# Altium PCB pcb.PcbDoc
Units mm, origin at the board's own origin, x right, y up, seen from the top; angles counter-clockwise.
Board outline 60 x 45 mm, 2 copper layers (Top Layer, Bottom Layer); 36 components, 23 nets, 95 pads, 17 vias.
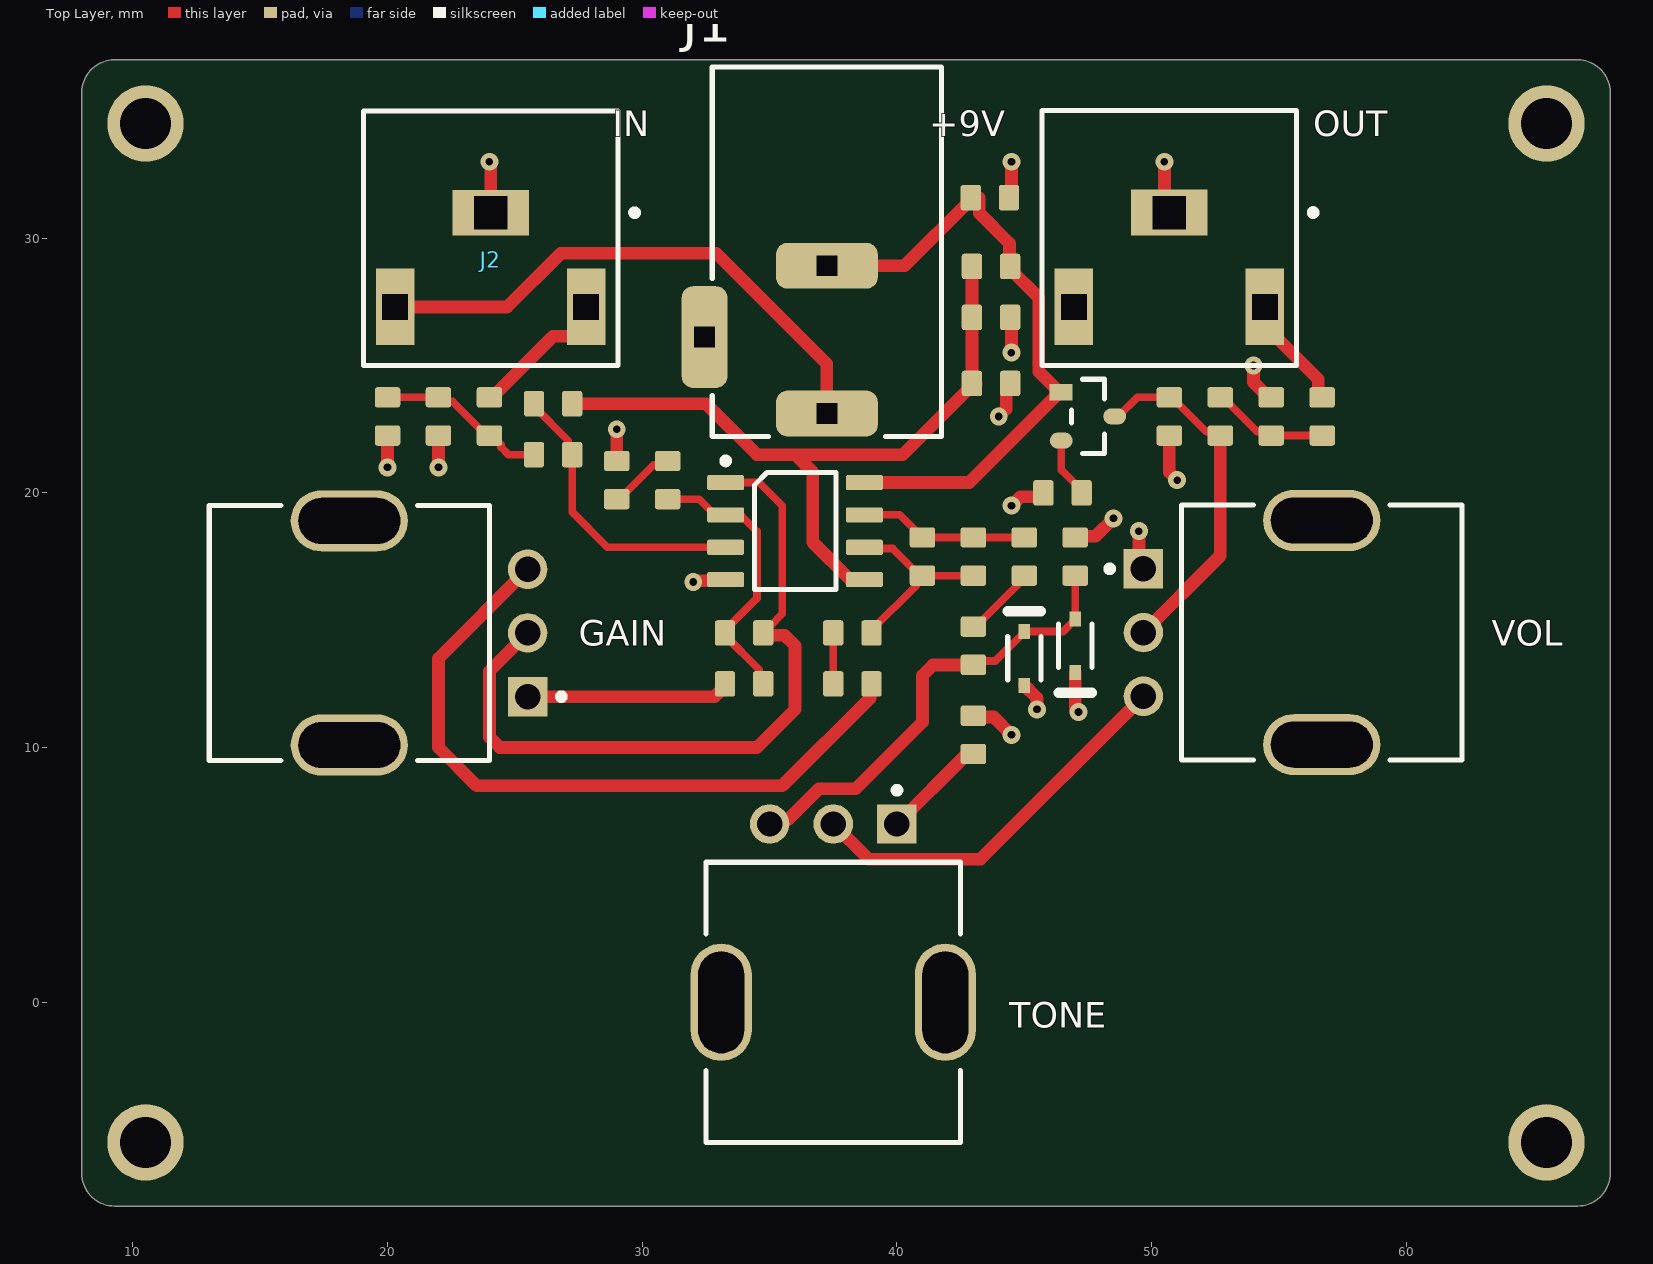
[diagram p0: Top Layer view]
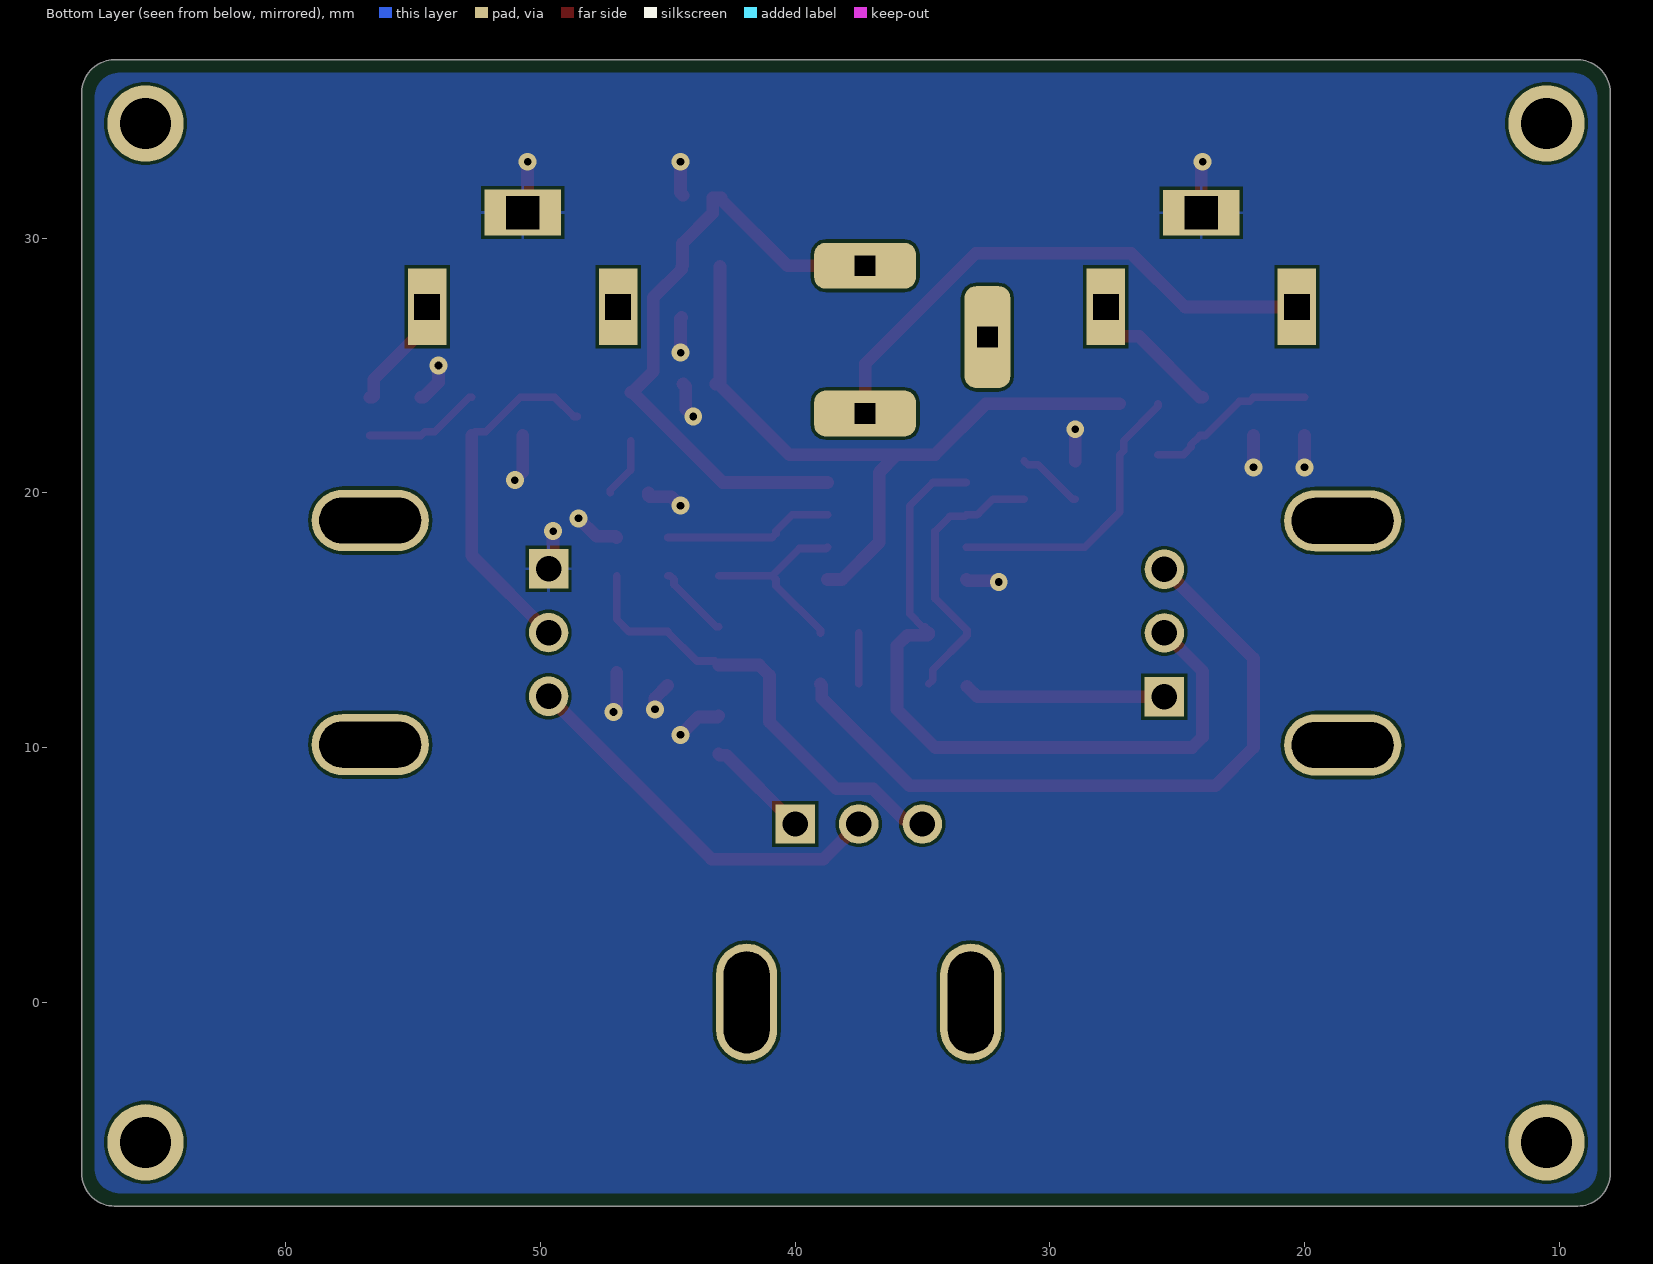
[diagram p1: Bottom Layer view, seen from below]
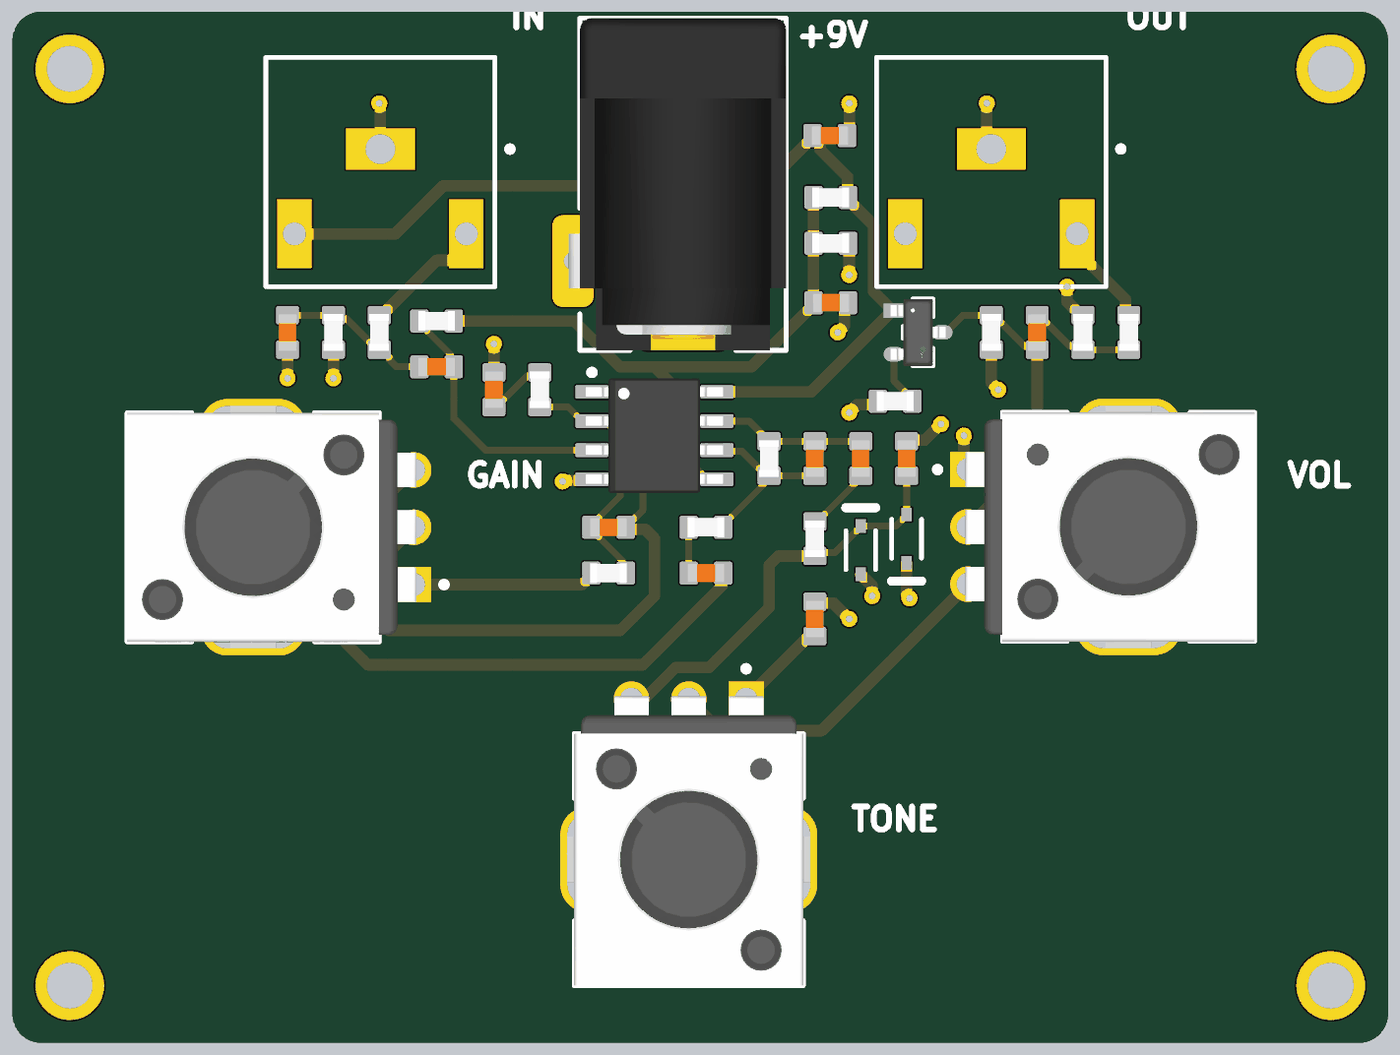
[diagram p2: 3D render of the assembled board from above, using the file's embedded part models]

## Layer stack, top to bottom
Top Solder: solder mask 0.0102, Solder Resist, Dk 3.5
Top Layer: signal copper 0.0356
Dielectric 1: dielectric 0.32, FR-4, Dk 4.8
Bottom Layer: signal copper 0.0356
Bottom Solder: solder mask 0.0102, Solder Resist, Dk 3.5

## Board outline
9.27,-8 cw(c9.27,-6.73) 8,-6.73 8,35.73 cw(c9.27,35.73) 9.27,37 66.73,37 cw(c66.73,35.73) 68,35.73 68,-6.73 cw(c66.73,-6.73) 66.73,-8

## Design rules (kind name [scope] priority, off if disabled: settings)
BoardOutlineClearance [All] p1: gap=0.2 ignorepadtopadclearanceinfootprint=FALSE
Clearance [All] p1: gap=0.127 ignorepadtopadclearanceinfootprint=FALSE except(0.25: Arc-Hole Track-Hole SMDPad-Hole THPad-Hole Via-Hole Fill-Hole Poly-Hole Region-Hole Text-Hole)
ComponentClearance [All] p1: gap=0.127 collisioncheckmode=3 verticalgap=0.127 showdistances=TRUE
DiffPairsRouting [All] p1: maxlimit=0.254 minlimit=0.127 mostfreqgap=0.127 toplayer_minwidth=0.127 toplayer_maxwidth=25.4 toplayer_prefwidth=0.127 bottomlayer_minwidth=0.127 bottomlayer_maxwidth=25.4 bottomlayer_prefwidth=0.127 maxuncoupledlength=12.7
Height [All] p1: minheight=0 maxheight=1816.048 prefheight=12.7
HoleSize [All] p1: absolutevalues=TRUE maxlimit=6.3 minlimit=0.3 maxpercent=80.000 minpercent=20.000
HoleToHoleClearance [All] p1: gap=0.25 allowstackedmicrovias=FALSE
MinimumAnnularRing [All] p1: minimumring=0.076
MinimumSolderMaskSliver [All] p1: minsoldermaskwidth=0
PlaneClearance [All] p1: clearance=0.127
PlaneConnect PlaneConnectPowerPads [InPadClass('PowerPads')] p1: planeconnectstyle=Direct reliefexpansion=0.508 reliefentries=4 reliefconductorwidth=0.254 reliefairgap=0.254
PlaneConnect [All] p2: pad.planeconnectstyle=Relief pad.reliefexpansion=0.3 pad.reliefentries=4 pad.reliefconductorwidth=0.127 pad.reliefairgap=0.127 via.planeconnectstyle=Direct via.reliefexpansion=0.3 via.reliefentries=4 via.reliefconductorwidth=0.127 via.reliefairgap=0.127
PolygonConnect PolygonConnectPowerPads [All vs (InPadClass('PowerPads'))] p1: connectstyle=Direct reliefconductorwidth=0.254 reliefentries=4 polygonreliefangle="90 Angle" airgapwidth=0.254
PolygonConnect [All] p2: thpad.connectstyle=Relief thpad.reliefconductorwidth=0.127 thpad.reliefentries=4 thpad.polygonreliefangle="90 Angle" thpad.airgapwidth=0.127 smdpad.connectstyle=Relief smdpad.reliefconductorwidth=0.127 smdpad.reliefentries=4 smdpad.polygonreliefangle="90 Angle" smdpad.airgapwidth=0.127 via.connectstyle=Direct via.reliefconductorwidth=0.127 via.reliefentries=4 via.polygonreliefangle="90 Angle" via.airgapwidth=0.127
RoutingVias [All] p1: holewidth=0.3 width=0.6 viastyle="Through Hole" minholewidth=0.3 minwidth=0.6 maxholewidth=0.6 maxwidth=6.6
SilkToSilkClearance [All] p1: silktosilkclearance=0
SilkToSolderMaskClearance [IsPad] p1: minsilkscreentomaskgap=0.127 clearancetoexposedcopper=TRUE
SolderMaskExpansion [All] p1: expansion=0.075 istentingtop=FALSE
SupplyNets "Schematic Supply Nets_1" [InNet('GND')] p1: voltage=0.000
SupplyNets "Schematic Supply Nets" [InNet('+9V')] p2: voltage=0.000
Width [All] p1: maxlimit=25.4 minlimit=0.127 preferedwidth=0.127 minimp=50.000000 maximp=50.000000 favimp=50.000000
20 further rules are at their usual default settings.

## Classes and differential pairs
component class schematic: J J1

## Components (designator, comment, footprint, x,y, rotation, side; value= is the part's Value field where it differs from the comment)
C1 "47u" CAP_0603 43.65,31.592 r0 top
C2 "47u" CAP_0603 43.694,24.295 r0 top
C3 "680n" CAP_0603 38.25,12.5 r180 top
C4 "1u" CAP_0603 45,17.5 r90 top
C5 "50p" CAP_0603 34,14.5 r180 top
C6 "100p" CAP_0603 43,17.5 r270 top
C7 "47n" CAP_0603 29,20.5 r90 top
C8 "1u" CAP_0603 52.694,23 r270 top
C9 "22n" CAP_0603 26.5,21.5 r180 top
C10 "22n" CAP_0603 47,17.5 r270 top
C11 "22n" CAP_0603 43,10.5 r270 top
C12 "100p" CAP_0603 20,23 r90 top
D1 "1N4148" DIOD-SOD323-2-A_V 45,13.5 r90 top
D2 "1N4148" DIOD-SOD323-2-A_V 47,14 r270 top
J1 "9V DC" 694106301002 37.248,29.466 r180 top
J2 "INPUT AUX" SWIT-PJRAN1X1U01X_V 24.05,31 r180 top
J3 "OUTPUT AUX" SWIT-PJRAN1X1U01X_V 50.693,31.004 r180 top
Q1 "J201" FP-318BM-IPC_C 47.5,23 r0 top
R1 "10k" RES_0603 43.694,28.891 r0 top
R2 "10k" RES_0603 43.694,26.891 r180 top
R3 "100k B TAPER" FP-PTV09A-4-MFG 18.5,14.5 r90 top value=10kΩ
R4 "2.2k" RES_0603 34,12.5 r0 top
R5 "4.7k" RES_0603 31,20.5 r270 top
R6 "680k" RES_0603 41,17.5 r270 top
R7 "220" RES_0603 56.694,23 r90 top
R8 "100k B TAPER" FP-PTV09A-4-MFG 56.679,14.517 r270 top value=10kΩ
R9 "10k" RES_0603 24,23 r90 top
R10 "100k B TAPER" FP-PTV09A-4-MFG 37.5,0 r180 top value=10kΩ
R11 "10k" RES_0603 38.25,14.5 r180 top
R12 "1k" RES_0603 43,14 r90 top
R13 "10k" RES_0603 54.694,23 r270 top
R14 "20k" RES_0603 50.694,23 r90 top
R15 "10k" RES_0603 46.5,20 r0 top
R16 "1M" RES_0603 22,23 r90 top
R17 "1M" RES_0603 26.5,23.5 r180 top
U1 "TL072" SOIC-8 36,18.5 r0 top

## Footprints (in the part's own frame and the unit in brackets; to place one, negate y for a bottom-side part, rotate by r counter-clockwise, add the part's x,y. Pads: shape width x height; smd on the part's side, far side on the other; paste and mask are expansions set on the pad)
694106301002 [mm] "DC Power Jack Right Angled(6.4)"
  rrect50% 4x1.8 hole 0.8 square: 1(0,6.35) 2(0,0.55)
  rrect50% 1.8x4 hole 0.8 square: 3(4.8,3.35)
  silkscreen extent -4.5,-7.25 4.5,7.25, body extent -4.5,-7.25 5,7.25, height 10.75
CAP_0603 [mm]
  rrect25% 0.8x1 smd: 1(-0.75,0) 2(0.75,0)
  body extent -0.8,-0.4 0.8,0.4, height 0.51
DIOD-SOD323-2-A_V [mm] "SOD-323, 2-Leads, Body 1.7x1.3mm"
  rect 0.59x0.45 smd: 1(-1.055,0) 2(1.055,0)
  silkscreen extent -0.85,-0.65 1.85,0.65, body extent -0.85,-0.65 0.85,0.65, height 1.2
FP-318BM-IPC_C [mm]
  rect 0.904x0.631 smd paste+0 mask+0: 1(-1.05,0.95)
  rrect100% 0.904x0.631 smd paste+0 mask+0: 2(-1.05,-0.95) 3(1.05,0)
  silkscreen extent -0.65,-1.46 0.65,1.46, body extent -1.6,-1.56 1.6,1.56, height 0.25
FP-PTV09A-4-MFG [mm]
  rect 1.55x1.55 hole 1 paste-2539.97 mask+0: 1(-2.5,-7)
  round 1.55 hole 1 paste-2539.97 mask+0: 2(0,-7) 3(2.5,-7)
  rrect100% 2.4x4.6 hole 4 slot 1.8 at 0 deg paste-2539.97 mask+0: 4(-4.4,0) 5(4.4,0)
  silkscreen extent -5,-8.45 5,5.5, body extent -5.8,-7.88 5.8,5.6, height 0.25
RES_0603 [mm]
  rrect25% 0.8x1 smd: 1(-0.75,0) 2(0.75,0)
  body extent -0.8,-0.43 0.8,0.43, height 0.52
SOIC-8 [mm] "SOIC, 8-Leads, Body 4.91x3.90mm, Pitch 1.27mm, IPC Medium Density"
  rrect25% 1.45x0.6 smd: 1(-2.725,1.905) 2(-2.725,0.635) 3(-2.725,-0.635) 4(-2.725,-1.905) 5(2.725,-1.905) 6(2.725,-0.635) 7(2.725,0.635) 8(2.725,1.905)
  silkscreen extent -2.85,-2.3 1.6,2.88, body extent -3,-2.5 3,2.5, height 1.75
SWIT-PJRAN1X1U01X_V [mm] "Jack, 3-Leads, Body 19.5x10mm"
  rect 3x1.8 hole 1.3 square paste-2539.97: 1(0,0)
  rect 1.5x3 hole 1 square paste-2539.97: 2(-3.75,3.7) 3(3.75,3.7)
  silkscreen extent -5.77,-4 5,6, body extent -5,-13.5 5,6, height 13

## Part data
C1 C2 C3 C4 C5 C6 C7 C8 C9 C10 C11 C12: library part CAP_0603, "Capacitor SMD 0603"
D1 D2: library part CMP-1667-00004-1, "Fast Switching Diode, 75 V, 0.3 A, -65 to 150 degC, 2-Pin SOD323, RoHS, Tape and Reel", ComponentLink1Description="Manufacturer URL", ComponentLink1URL=http://www.diodes.com/, ComponentLink2Description=Datasheet, ComponentLink2URL=http://www.diodes.com/datasheets/ds30097.pdf, DatasheetVersion="Rev. 25-2, 03/2016", PackageDescription="2-Pin Small Outline Diode, Body 1.7 x 1.3 mm", PackageReference=SOD323-2
J1: library part CMP-1502-00188-2, Color=Black, Current Rating=5A, Flammability Rating="UL94 V-0", Insulation Resistance=100MΩ, Max Operating Temperature=85°C, Min Operating Temperature=-40°C, Operating Supply Voltage=24V, Voltage Rating (DC)=20V, Connector Type=Power, Contact Gender=Female, Contact Material="Gold, Tin", Contact Plating=Tin, Gender=Male, Height=11mm, Housing Material=Polyamide, Mount="Through Hole", NexarPartId=52676100, Number of Contacts=3, Packaging=Bulk, REACH SVHC=Unknown, RoHS=Compliant, Shielding=Unshielded, Termination="Through Hole", Voltage Rating=24V
J2 J3: library part CMP-1772-00003-1, "Female Phono Jack, 3 Position, Height 13 mm, Tail Length 4 mm, RoHS, Bulk", Capacitance="100 nF", Case\Package=Radial, Max Operating Temperature="125 degC", Min Operating Temperature="-55 degC", Package Quantity=500, Tolerance=10%, Type (Capacitors)=X7R, Voltage Rating="50 V", ComponentLink1Description="Manufacturer URL", ComponentLink1URL=http://www.switchcraft.com/, ComponentLink2Description=Datasheet, ComponentLink2URL=http://www.conxall.com/Drawings/pjran1x1u__x_series_cd.pdf, DatasheetVersion="Rev. A, 01/2006", Height="3.18 mm", Lead Pitch="2.54 mm", Length="6.6 mm", Mount="Through Hole", PackageDescription="Female Phono Jack, 3 Position, Height 13 mm, Tail Length 4 mm", PackageReference=PJRAN1X1U01X, Packaging=Bulk, Pins=2, Radiation Hardening=No, REACH SVHC="No SVHC", RoHSCompliant=true, Voltage Rating (DC)="50 V", Width="5.08 mm"
Q1: library part CMP-07172-000003-1, "JFET N-CH 40V 350MW SOT23", Breakdown Voltage=-40V, Continuous Drain Current=1mA, Manufacturer="ON Semiconductor", Manufacturer Part Number=MMBFJ201, Max Junction Temp=+150°C, Package=318BM, Power Dissipation=350mW, Temperature="-55°C to +150°C", Temperature Range Low=-55°C, Automotive=No, Category=Trans, ComponentLink2Description=Datasheet, ComponentLink2URL=https://www.onsemi.com/pub/Collateral/MMBFJ202-D.pdf, Device Class L1="Discrete Semiconductors", Device Class L2=Transistors, Device Class L3=JFETs, Digikey Description="JFET N-CH 40V 350MW SOT23", Footprint Url=https://www.onsemi.com/pub/Collateral/318BM.PDF, Gate To Source Voltage=-40V, Height=1.2mm, Ipc Land Pattern Name=SOT95P240X120-3, Lead Free=Yes, Mouser Description="JFET N-Channel Transistor General Purpose", Number Of Channels=1, Number Of N Channels=1, Octopart=https://octopart.com/mmbfj201-on+semiconductor-84330255, RoHS=TRUE, Rthja Max=357°C/W, Standoff Height=0mm, Temperature Range High=+150°C
R1 R2 R4 R5 R6 R7 R9 R11 R12 R13 R14 R15 R16 R17: library part RES_0603, "Resistor SMD 0603"
R3 R8 R10: library part CMP-07234-000013-1, "POT 10K OHM 1/20W CARBON LINEAR", Manufacturer="Bourns Inc.", Manufacturer Part Number=PTV09A-4020U-B103, Package=PTV09A-4, Power Rating=0.05W, Resistance=10kΩ, Temperature="-10°C to +50°C", Temperature Range High=+50°C, Temperature Range Low=-10°C, Tolerance=20%, Voltage Rating=50V, Automotive=No, Category=Res, ComponentLink2Description=Datasheet, ComponentLink2URL=https://www.bourns.com/docs/product-datasheets/ptv09.pdf?sfvrsn=5e1089f1_12, Composition=Carbon, Device Class L1="Passive Components", Device Class L2=Resistors, Device Class L3="Variable Resistors and Potentiometers", Digikey Description="POT 10K OHM 1/20W CARBON LINEAR", Height=20.5mm, Lead Free=Yes, Mouser Description="Potentiometers 10K LINEAR 20%", Octopart=https://octopart.com/ptv09a-4020u-b103-bourns-1878033, RoHS=TRUE, Series=PTV09
U1: library part TL072CDT, "Dual JFET Low-Noise Operational Amplifiers", Manufacturer=STMicroelectronics, Manufacturer Part Number=TL072CDT

## Free pads (board coordinates)
  round 3 hole 2: 2(10.5,-5.5) 2(10.5,34.5) 2(65.5,-5.5) 2(65.5,34.5)

## Via types
v1: diameter 0.7, hole 0.3, Top Layer to Bottom Layer, 17 vias

## Nets (pads, with @x,y where several pads share a name; then routed paths per layer and width w, separated by ;. In a path a pad name is that pad's centre, name@x,y a point inside that pad or via, vN(x,y) a via of type N, cw(c..) or ccw(c..) an arc to the next point about the centre after c; other vN are vias at no path point)
+9V: C1.1 J1.2 Q1.1 R1.2 U1.8 | length 25.2
  Top Layer w0.5: J1.2 40.298,28.916 C1.1@42.902,31.52 ; U1.8 42.838,20.405 Q1.1@46.383,23.95 ; C1.1@42.902,31.584 43.229,31.584 43.229,30.984 44.42,29.793 44.42,28.916 R1.2 44.444,28.791 45.568,27.667 45.568,24.764 Q1.1@46.383,23.95 ; Q1.1 Q1.1@46.383,23.95
GND: C1.2 C2.2 C7.2 C10.1 C11.1 C12.1 D1.1 D2.2 J2.1 J3.1 R2.1 R8.1 R13.1 R14.1 R15.1 R16.1 U1.4 | length 26.6
  Top Layer w0.5: v1(20,21) C12.1 ; v1(22,21) R16.1 ; v1(24,33) 24.05,32.95 J2.1 ; C7.2 v1(29,22.5) ; v1(32,16.5) 32.045,16.545 33.225,16.545 U1.4 ; C11.1 43.05,11.2 43.8,11.2 v1(44.5,10.5) ; v1(44,23) 44.287,23.287 44.287,24.171 44.393,24.277 C2.2@44.399,24.277 ; C1.2@44.399,31.69 44.5,31.791 v1(44.5,33) ; R2.1 44.494,26.841 v1(44.494,25.506) v1@44.5,25.5 ; v1(44.5,19.5) 44.85,19.85 45.7,19.85 45.75,19.9 R15.1 ; D1.1 45.5,11.945 v1(45.5,11.5) ; D2.2 47,11.526 v1(47.127,11.399) ; C10.1 47.05,18.3 47.8,18.3 ; 48,18.5 47.8,18.3 ; v1(48.5,19) 47.8,18.3 ; v1(49.5,18.5) 49.5,17.196 R8.1 ; v1(50.5,33) 50.5,31.198 J3.1 ; R14.1 50.694,20.806 v1(51,20.5) ; v1(54,25) 54,24.344 54.594,23.75 R13.1
NetC3_1: C3.1 R3.3 | length 28
  Top Layer w0.5: R3.3 22,13.5 22,10 23.5,8.5 35.5,8.5 38.95,11.95 38.95,12.45 C3.1
NetC3_2: C3.2 R11.2 | length 2
  Top Layer w0.3: C3.2 R11.2
NetC4_1: C4.1 R12.2 | length 2.9
  Top Layer w0.3: R12.2 43.1,14.75 44.75,16.4 44.75,16.6 44.9,16.75 C4.1
NetC4_2: C4.2 C6.1 R6.1 U1.7 | length 6.7
  Top Layer w0.3: U1.7 40.115,19.135 40.75,18.5 40.75,18.4 40.9,18.25 R6.1 C6.1 C4.2
NetC5_1: C5.1 R3.2 U1.1 | length 29.5
  Top Layer w0.3: U1.1 34.595,20.405 35.5,19.5 35.5,15.25 35,14.75 34.9,14.75 34.75,14.6 C5.1
  Top Layer w0.5: R3.2 24,13 24,10.41 24.41,10 34.5,10 36,11.5 36,14.002 35.59,14.412 34.8,14.412 34.75,14.462 C5.1
NetC5_2: C5.2 R4.2 R5.2 U1.2 | length 11.1
  Top Layer w0.3: R5.2 32.236,19.75 32.8,19.186 32.85,19.135 U1.2 33.325,19.085 33.915,19.085 34.504,18.496 34.504,15.854 33.25,14.6 C5.2 ; C5.2@33.25,14.4 34.6,13.05 34.6,12.65 R4.2
NetC6_2: C6.2 R6.2 R11.1 U1.6 | length 7.8
  Top Layer w0.3: U1.6 38.775,17.815 39.835,17.815 R6.2@40.9,16.75 ; R11.1 39,14.6 40.75,16.35 40.75,16.6 R6.2@40.9,16.75 ; C6.2 R6.2@40.9,16.75
NetC7_1: C7.1 R5.1 | length 2.6
  Top Layer w0.3: C7.1 29.1,19.75 30.45,21.1 30.85,21.1 R5.1
NetC8_1: C8.1 R7.1 R13.2 | length 4.6
  Top Layer w0.3: C8.1 52.794,23.75 54.144,22.4 54.544,22.4 R13.2 R7.1
NetC8_2: C8.2 Q1.3 R8.2 R14.2 | length 14.1
  Top Layer w0.3: Q1.3 48.693,23 49.443,23.75 R14.2 50.794,23.75 52.144,22.4 52.544,22.4 C8.2
  Top Layer w0.5: R8.2 52.694,17.533 C8.2
NetC9_1: C9.1 R17.2 U1.3 | length 11.5
  Top Layer w0.3: R17.2 25.75,23.4 27.1,22.05 27.1,21.65 C9.1 27.25,19.25 28.635,17.865 U1.3
NetC9_2: C9.2 C12.2 R9.1 R16.2 | length 6.7
  Top Layer w0.3: C12.2 R16.2 22.15,23.6 22.55,23.6 23.9,22.25 R9.1 24.1,22.25 24.457,21.893 24.457,21.793 24.75,21.5 C9.2
NetC10_2: C10.2 D1.2 D2.1 R10.3 R12.1 | length 18.1
  Top Layer w0.3: R12.1 43.15,13.4 43.865,13.4 45,14.535 D1.2 46.52,14.555 47,15.035 D2.1 C10.2
  Top Layer w0.5: R10.3 35.163,7.163 35.712,7.163 36.929,8.379 38.379,8.379 41,11 41,12.832 41.41,13.242 42.992,13.242 R12.1
NetC11_2: C11.2 R10.1 | length 5
  Top Layer w0.3: R10.1 R10.1@40.525,7.525 ; C11.2@42.9,9.75 C11.2
  Top Layer w0.5: R10.1 42.7,9.7 42.95,9.7 C11.2
NetJ2_2: J2.2 R9.2 | length 5.7
  Top Layer w0.5: R9.2 24.1,23.75 26.5,26.15 27.4,26.15 27.8,26.55 J2.2
NetJ3_2: J3.2 R7.2 | length 4.5
  Top Layer w0.5: J3.2 54.443,26.554 56.544,24.453 56.544,23.8 56.594,23.75 R7.2
NetQ1_2: Q1.2 R15.2 | length 2.4
  Top Layer w0.3: Q1.2 46.45,20.9 47.25,20.1 R15.2
NetR3_1: R3.1 R4.1 | length 8
  Top Layer w0.3: R4.1@33.25,12.4 R4.1
  Top Layer w0.5: R3.1 32.85,12 R4.1@33.25,12.4
NetR8_3: R8.3 R10.2 | length 15.4
  Top Layer w0.5: R10.2 38.879,5.621 43.283,5.621 R8.3
PWR: J1.1 J2.3 | length 21.6
  Top Layer w0.5: J2.3 24.695,27.3 26.799,29.404 32.91,29.404 37.248,25.066 J1.1
VREF: C2.1 R1.1 R2.2 R17.1 U1.5 | length 28.9
  Top Layer w0.5: R17.1 32.5,23.5 34.5,21.5 36,21.5 ; U1.5 38.16,16.595 36.692,18.063 36.692,20.808 36,21.5 ; R1.1 R2.2 42.944,24.383 43.05,24.277 43.118,24.277 43.008,24.277 40.232,21.5 36,21.5
pads on no net: J1.3 J3.3 R3.4 R3.5 R8.4 R8.5 R10.4 R10.5

## Polygon pours and split planes (outlines as drawn)
GND on Bottom Layer "GND_L02_P000" (solid, pour order 0): 9.5,36.5 ccw(c9.5,35.5) 8.5,35.5 8.5,-6.5 ccw(c9.5,-6.5) 9.5,-7.5 66.5,-7.5 ccw(c66.5,-6.5) 67.5,-6.5 67.5,35.5 ccw(c66.5,35.5) 66.5,36.5

## Silkscreen, mask and mechanical layers (free items; w line width, h text height)
Top Overlay:
  text "IN" at 28.848,34 h1
  text "+9V" at 41.265,34 h1
  text "OUT" at 56.348,34 h1
  text "GAIN" at 27.501,14 h1
  text "VOL" at 63.348,14 h1
  text "TONE" at 44.417,-1 h1